# EAGLE board ps_adjustable_hv (EAGLE 9.4.2)
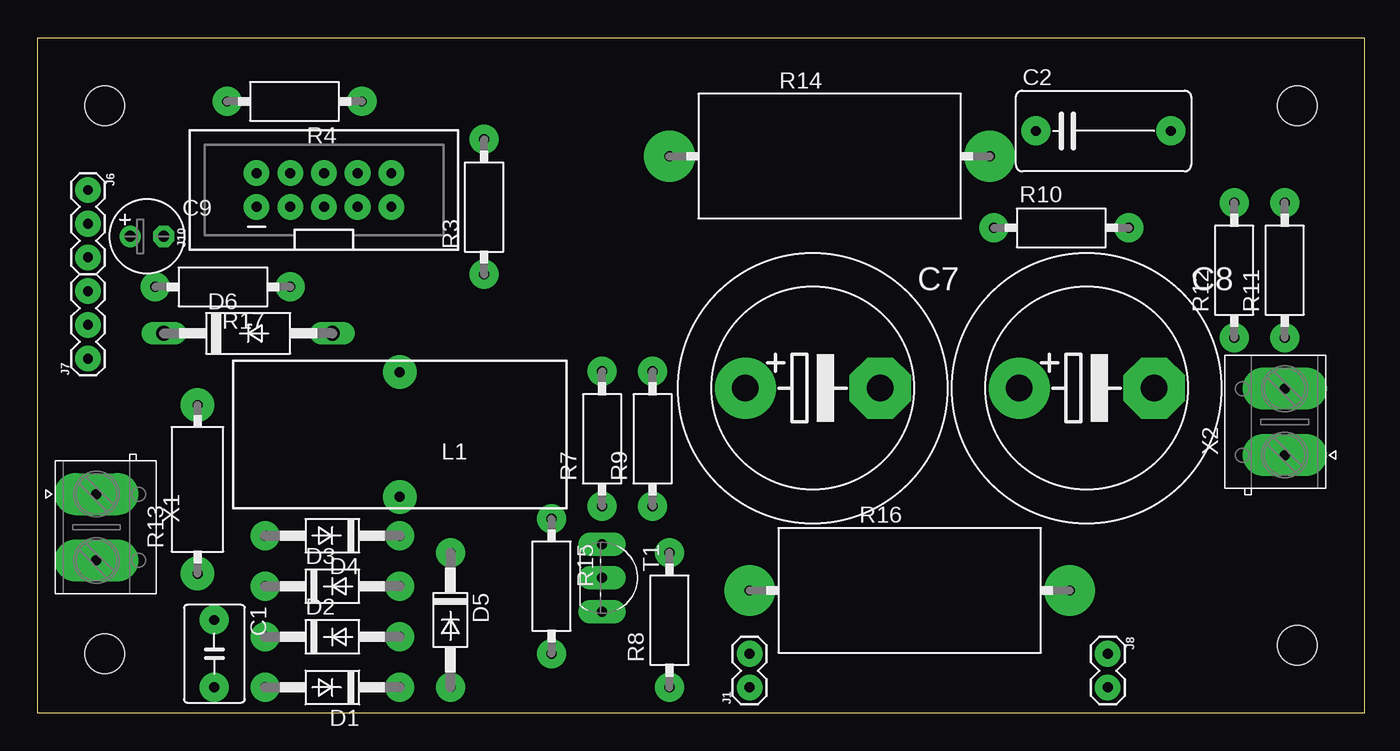
[diagram p0: board, top side]
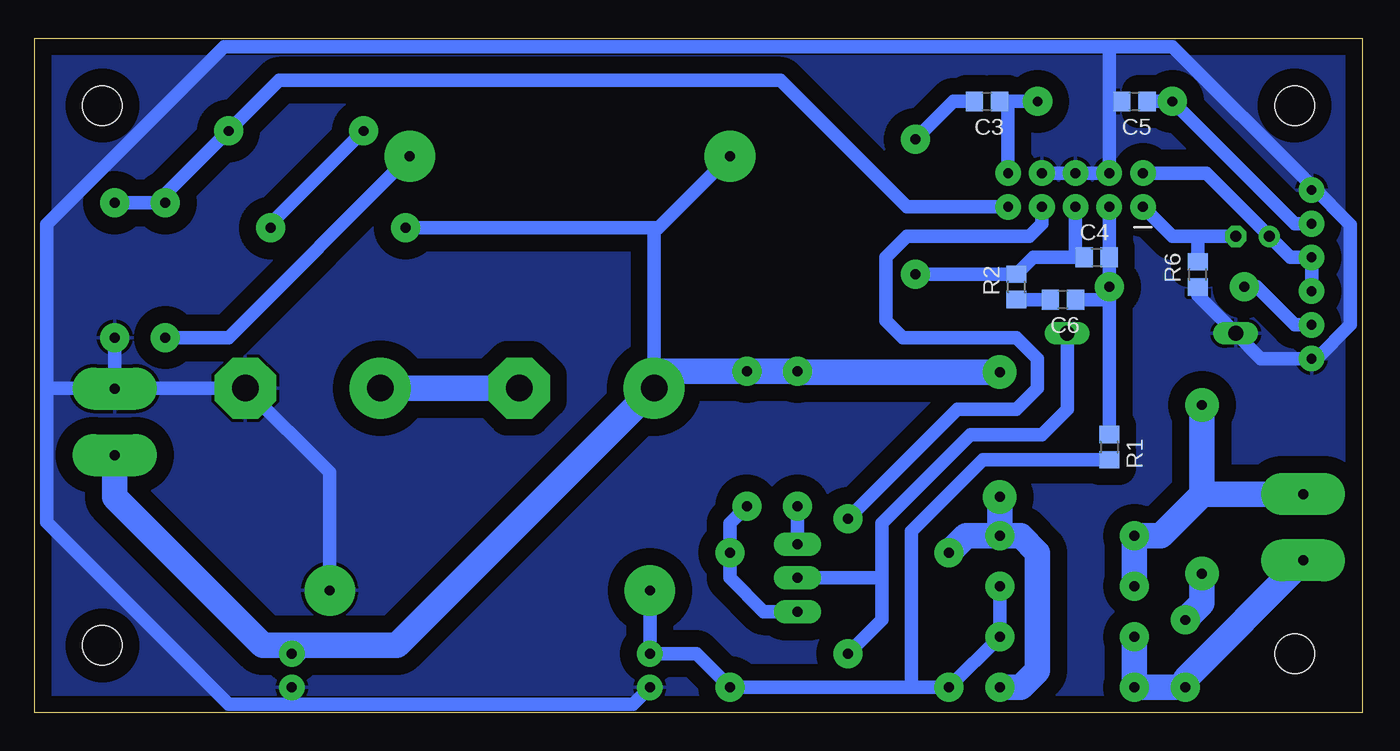
[diagram p1: board, bottom side, seen from below]

Size 100 x 50.8 mm. Coordinates in mm from the lower left corner, seen from the top.
Outline: 0,0 100,0 100,50.8 0,50.8 0,0
Copper layers (1*16): Top 0.035mm / dielectric 1.5mm / Bottom 0.035mm
Design rules "default": minimum track width 6mil, minimum drill 0.35mm, track to track 6mil, track to pad 6mil, pad to pad 6mil, via to via 6mil, smd to smd 6mil, copper to edge 40mil, drill to drill 6mil, minimum pad ring 10mil, minimum via ring 8mil, stop-mask expansion 4mil, vias tented up to drill 0mil, thermal gap 10mil
Holes 3 mm at 5.08,4.45 5.08,45.72 94.92,5.08 94.92,45.72

## Footprints (pad centres in the part's own frame; a part is rotated, then mirrored left to right if it is on the bottom)
C050-045X075 = drill 0.75 pad 2.184: 1 -2.54,0; 2 2.54,0
C102-064X133 = drill 0.75 pad 2.184: 1 -5.08,0; 2 5.08,0
C0805 = smd 1.3 x 1.5: 1 -0.95,0; 2 0.95,0
EB20D = drill 2.007 pad 4.597: + -5.08,0 | drill 2.007 pad 4.597 octagon: - 5.08,0
E2,5-6 = drill 0.813 pad 1.6: + -1.27,0 | drill 0.813 pad 1.6 octagon: - 1.27,0
DO41-10 = drill 0.75 pad 2.184: A 5.08,0; C -5.08,0
P1Z12 = drill 1.118 long: A 6.35,0; C -6.35,0
1X02 = drill 0.75 pad 1.93: 1 0,0; 2 2.54,0
1X03 = drill 0.75 pad 1.93: 1 0,0; 2 2.54,0; 3 5.08,0
2X5-SHROUDED = drill 0.75 pad 1.93: 1 -1.27,5.08; 2 1.27,5.08; 3 -1.27,2.54; 4 1.27,2.54; 5 -1.27,0; 6 1.27,0; 7 -1.27,-2.54; 8 1.27,-2.54; 9 -1.27,-5.08; 10 1.27,-5.08
TJ5-U1 = drill 0.75 pad 2.54: 1 -4.7,0; 2 4.7,0
R0805 = smd 1.3 x 1.5: 1 -0.95,0; 2 0.95,0
VMTA55 = drill 0.75 pad 2.184: 1 -5.08,0; 2 5.08,0
VMTB60 = drill 0.75 pad 2.54: 1 -6.35,0; 2 6.35,0
VTA53 = drill 0.75 pad 3.81: 1 -12.065,0; 2 12.065,0
TO92-CBE = drill 0.75 pad 1.778 long: B 0,0; C -2.54,0; E 2.54,0
DG306-5.0-02P = drill 0.75 pad 3.175 long: 1 -2.5,0; 2 2.5,0

## Placement (x,y rotation side)
C1  [C050-045X075]  13.34,4.45 270 top
C2  [C102-064X133]  80.33,43.81 0 top
C3  [C0805]  28.26,46.04 180 bottom
C4  [C0805]  20,34.29 0 bottom
C5  [C0805]  17.14,46.04 180 bottom
C6  [C0805]  22.54,31.11 180 bottom
C7  [EB20D]  58.42,24.45 0 top
C8  [EB20D]  79.06,24.45 0 top
C9  [E2,5-6]  8.26,35.88 0 top
D1  UF4003  [DO41-10]  22.23,1.91 180 top
D2  UF4003  [DO41-10]  22.23,5.71 0 top
D3  UF4003  [DO41-10]  22.23,9.53 0 top
D4  UF4003  [DO41-10]  22.23,13.34 180 top
D5  UF4003  [DO41-10]  31.11,6.99 270 top
D6  [P1Z12]  15.88,28.57 0 top
J1  [1X02]  53.66,1.91 90 top
J6  455-1750-1-ND  [1X03]  3.81,39.37 270 top
J7  455-1750-1-ND  [1X03]  3.81,26.67 90 top
J8  [1X02]  80.64,4.45 270 top
J10  [2X5-SHROUDED]  21.59,39.37 90 top
L1  [TJ5-U1]  27.3,20.95 90 top
R1  [R0805]  19.05,20 270 bottom
R2  [R0805]  26.04,32.07 90 bottom
R3  [VMTA55]  33.66,38.1 90 top
R4  [VMTA55]  19.37,46.04 180 top
R6  [R0805]  12.38,33.02 90 bottom
R7  [VMTA55]  42.55,20.64 90 top
R8  [VMTA55]  47.62,6.99 90 top
R9  [VMTA55]  46.35,20.64 90 top
R10  [VMTA55]  77.15,36.51 0 top
R11  [VMTA55]  93.98,33.34 90 top
R12  [VMTA55]  90.17,33.34 90 top
R13  [VMTB60]  12.06,16.83 90 top
R14  [VTA53]  59.69,41.91 0 top
R15  [VMTA55]  38.73,9.53 270 top
R16  [VTA53]  65.72,9.21 0 top
R17  [VMTA55]  13.97,32.07 180 top
T1  [TO92-CBE]  42.55,10.16 270 top
X1  DG3XX-02-5.0  [DG306-5.0-02P]  4.45,13.97 270 top
X2  DG3XX-02-5.0  [DG306-5.0-02P]  93.98,21.91 90 top

## Library data of the parts
C1 C2 = rcl_modify; SPICEPREFIX: C
C3-C9 = rcl; SPICEPREFIX: C
D1-D5 = diode_modify
D6 = diode
J1 J8 = SparkFun-Connectors
J6 J7 = SparkFun-Connectors; PROD_ID: XXX-00000
J10 = SparkFun-Connectors; PROD_ID: CONN-08671; SF_ID: PRT-08506
L1 = rcl_modify; SPICEPREFIX: L
R1 R2 R6 = rcl; SPICEPREFIX: R
R3 R4 R7-R17 = rcl_modify; SPICEPREFIX: R
T1 = transistor_modify
X1 X2 = degson

## Nets
1: C9.- J10.1 R6.2
2: C9.+ J6.3 J7.3 J10.2
3: C4.2 C6.1 J10.3 R1.1 R17.1
5: C4.1 J10.5 R2.2 R3.1
7: J10.7 R15.1
9: C2.2 J10.9 R11.2 R12.2
10: C3.1 J10.10 R4.1
GND: C5.2 C8.- D6.C J1.1 J6.1 J7.1 J8.2 J10.4 J10.6 J10.8 R6.1 R11.1 R16.2 X2.2
N$2: C1.1 R13.1
N$3: C1.2 D1.A D2.C X1.2
N$4: D3.C D4.A R13.2 X1.1
N$5: D2.A D3.A D5.A J1.2 R1.2 R8.1 R16.1
N$6: R7.1 T1.C
N$7: R8.2 R9.1 T1.E
N$8: C7.+ J8.1 L1.2 R7.2 R9.2 R10.1 R14.1 X2.1
N$9: D1.C D4.C D5.C L1.1
N$10: C2.1 R10.2
N$11: R12.1 R14.2
N$13: C7.- C8.+
N$15: D6.A R15.2 T1.B
N$16: C3.2 R3.2
N$18: C6.2 R2.1
N$21: C5.1 J6.2 R4.2
N$22: J7.2 R17.2

## Tracks (layer width: path | path; a pad name or v marks a point on that pad's centre or on a via)
1
  Bottom 1.016: C9.- 12.38,35.88 | J10.1 14.29,35.88 12.38,35.88 | R6.2 12.38,35.88
2
  Bottom 1.016: J10.2 11.75,40.64 C9.+ 5.4,34.29 J6.3 J7.3
3
  Bottom 1.016: C6.1 19.05,31.11 R17.1 | R17.1 C4.2 J10.3 | R17.1 | R1.1 R17.1 | R17.1
5
  Bottom 1.016: R3.1 R2.2 24.76,34.29 21.59,34.29 | 21.59,34.29 C4.1 | J10.5 21.59,34.29
7
  Bottom 1.016: R15.1 30.48,22.86 26.04,22.86 24.45,24.45 24.45,26.67 26.04,28.26 34.61,28.26 35.88,29.53 35.88,34.29 34.29,35.88 25.08,35.88 24.13,36.83 J10.7
9
  Bottom 1.016: J10.9 34.29,38.1 43.81,47.62 81.6,47.62 C2.2 90.17,39.05 R12.2 R11.2
10
  Bottom 1.016: R4.1 C3.1 26.67,45.4 J10.10
GND
  Bottom 1.016: R16.2 77.79,18.1 C8.- 94.02,24.45 | R11.1 X2.2 94.02,24.45 | 99.11,24.45 94.02,24.45 | 99.11,24.45 99.11,36.78 85.72,50.16 19.05,50.16 | J10.8 J10.6 J10.4 19.05,46.04 | 19.05,46.04 19.05,50.16 | 99.11,24.45 99.11,14.34 85.41,0.64 80.64,0.64 | C5.2 19.05,46.04 | 3.81,39.69 14.29,50.16 19.05,50.16 | J6.1 3.81,39.69 | 3.81,39.69 0.89,36.77 0.89,29.21 3.43,26.67 J7.1 7.62,26.67 D6.C 12.38,31.43 R6.1 | J1.1 54.93,0.64 61.28,0.64 80.64,0.64 | J8.2 80.64,0.64
  pour Bottom (isolate 1.27): 0,50.8 100,50.8 100.01,0 0,0
N$2
  Bottom 1.93: R13.1 12.06,8.26 C1.1
N$3
  Bottom 1.93: X1.2 4.45,11.43 13.34,2.54 C1.2 D1.A D2.C
N$4
  Bottom 1.93: D3.C D4.A 15.16,13.34 12.03,16.47 | X1.1 12.03,16.47 | 12.03,16.47 12.06,16.51 R13.2
N$5
  Bottom 1.016: D3.A D2.A D5.A 33.97,1.91 | 33.97,1.91 R8.1 50.16,4.45 J1.2 R16.1 | 33.97,1.91 33.97,13.65 28.57,19.05 R1.2
N$6
  Bottom 1.016: R7.1 T1.C
N$7
  Bottom 1.016: R9.1 47.62,14.29 R8.2 47.62,10.16 45.09,7.62 T1.E
N$8
  Bottom 1.016: R14.1 53.02,36.51 53.34,36.51 | 53.34,36.51 53.34,25.72 | R10.1 53.34,36.51
  Bottom 1.27: J8.1 80.64,5.08
  Bottom 1.93: L1.2 42.48,25.66 R7.2 R9.2 53.34,25.72 C7.+ 72.71,5.08 80.64,5.08 82.83,5.08 93.98,16.23 X2.1 | J8.1 80.33,4.76 80.33,5.08
N$9
  Bottom 1.93: L1.1 D4.C | D4.C 25.72,13.34 24.45,12.06 24.45,3.17 25.72,1.91 D1.C | D5.C 29.84,13.34 D4.C
N$10
  Bottom 1.016: R10.2 82.23,36.83 C2.1
N$11
  Bottom 1.016: R12.1 85.41,28.26 R14.2
N$13
  Bottom 1.93: C8.+ C7.-
N$15
  Bottom 1.016: 36.2,10.16 36.2,14.29 29.53,20.95 24.13,20.95 22.23,22.86 D6.A | 36.2,10.16 36.2,6.99 R15.2 | 36.2,10.16 T1.B
N$16
  Bottom 1.016: R3.2 30.8,46.04 C3.2
N$18
  Bottom 1.016: R2.1 C6.2
N$21
  Bottom 1.016: J6.2 5.08,36.83 R4.2 C5.1
N$22
  Bottom 1.016: R17.2 7.94,32.07 5.08,29.21 J7.2